# Altium PCB Cat_v2.PcbDoc (part 1 of 2)
Units mil, origin at the board's own origin, x right, y up, seen from the top; angles counter-clockwise.
Board outline 3347.94 x 3903.41 mil, 2 copper layers (Top, Bottom), stack 61.811 mil thick; 112 components, 72 nets, 329 pads, 647 vias.
Unrouted connection lines stored in the file: 1.
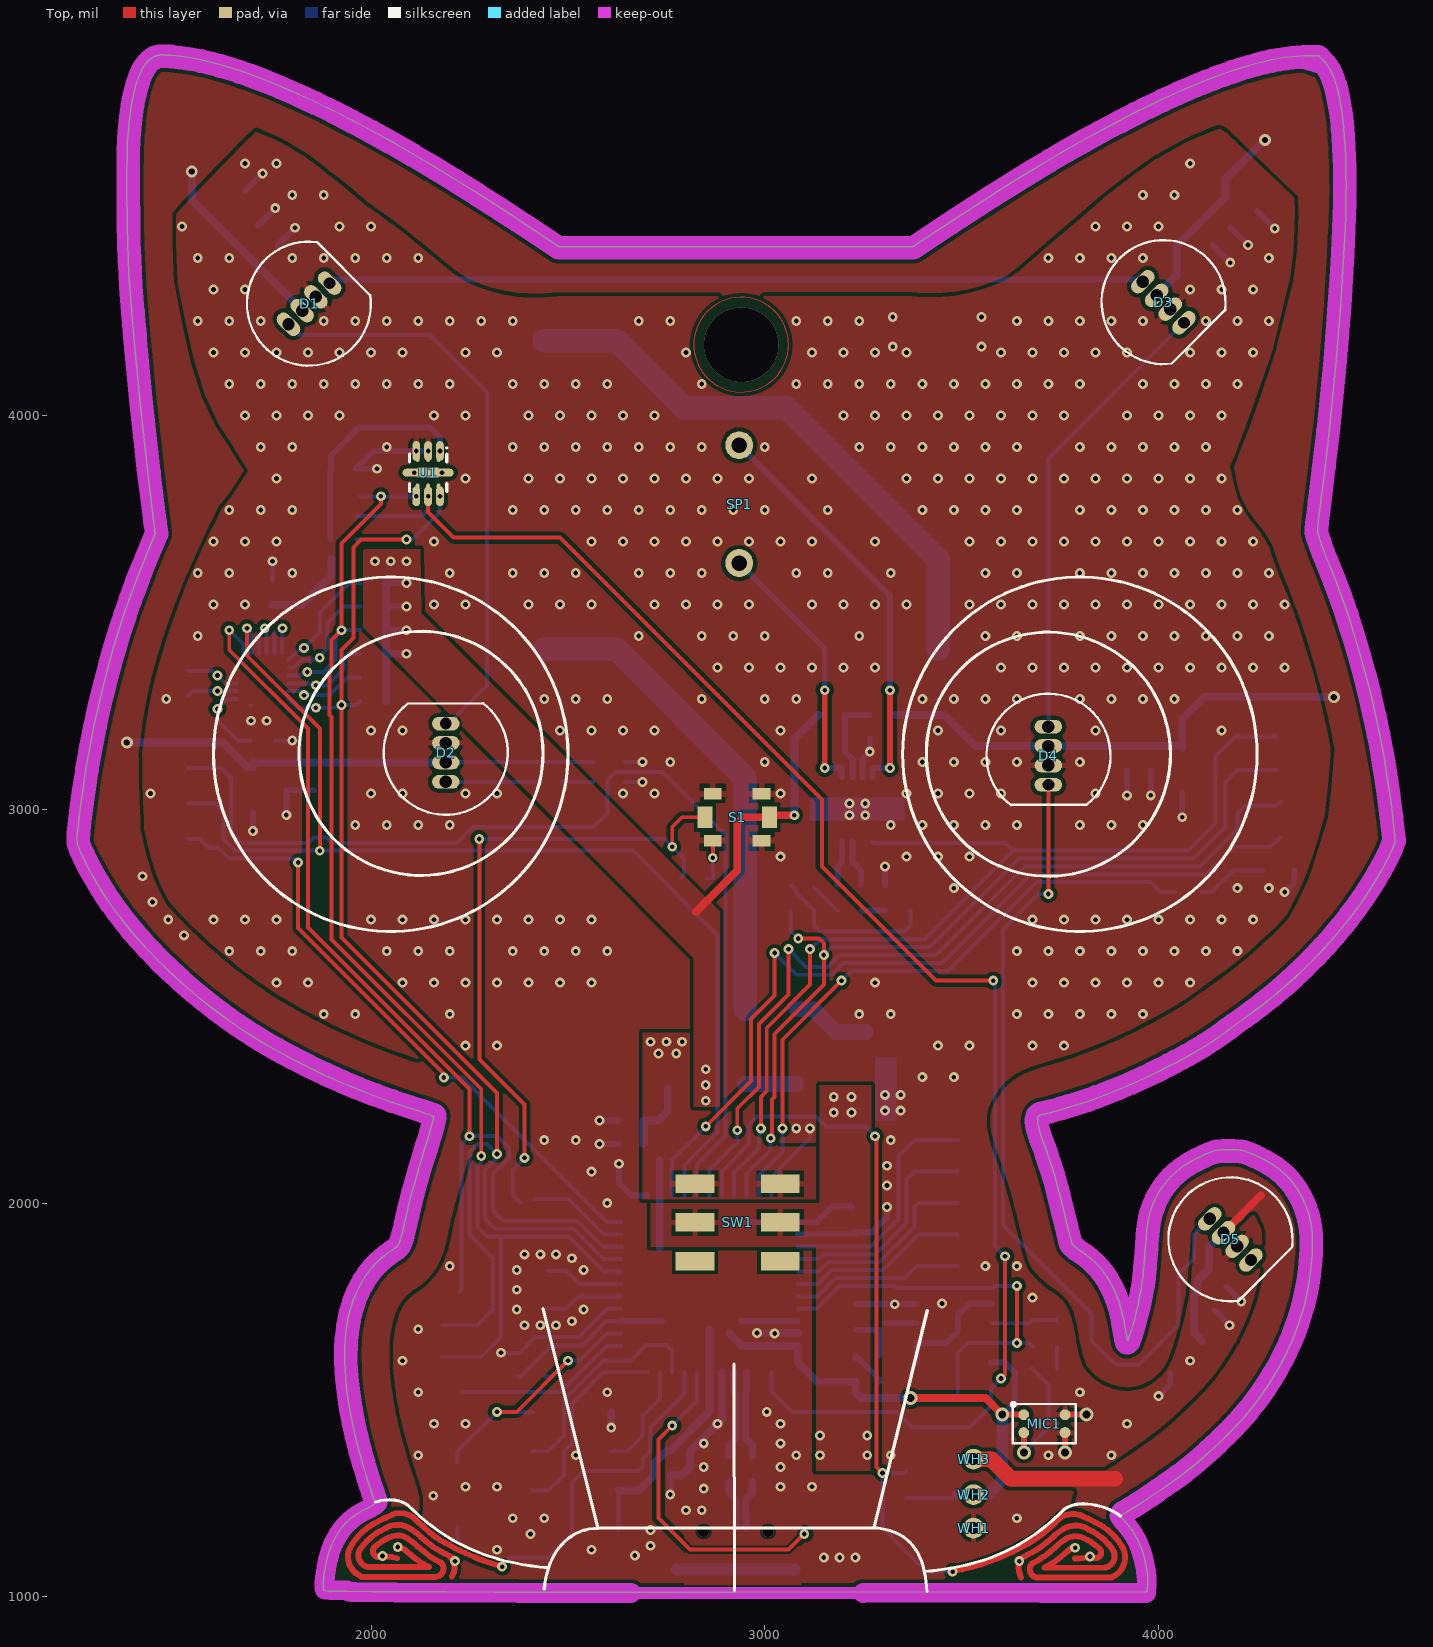
[diagram p0: Top view]
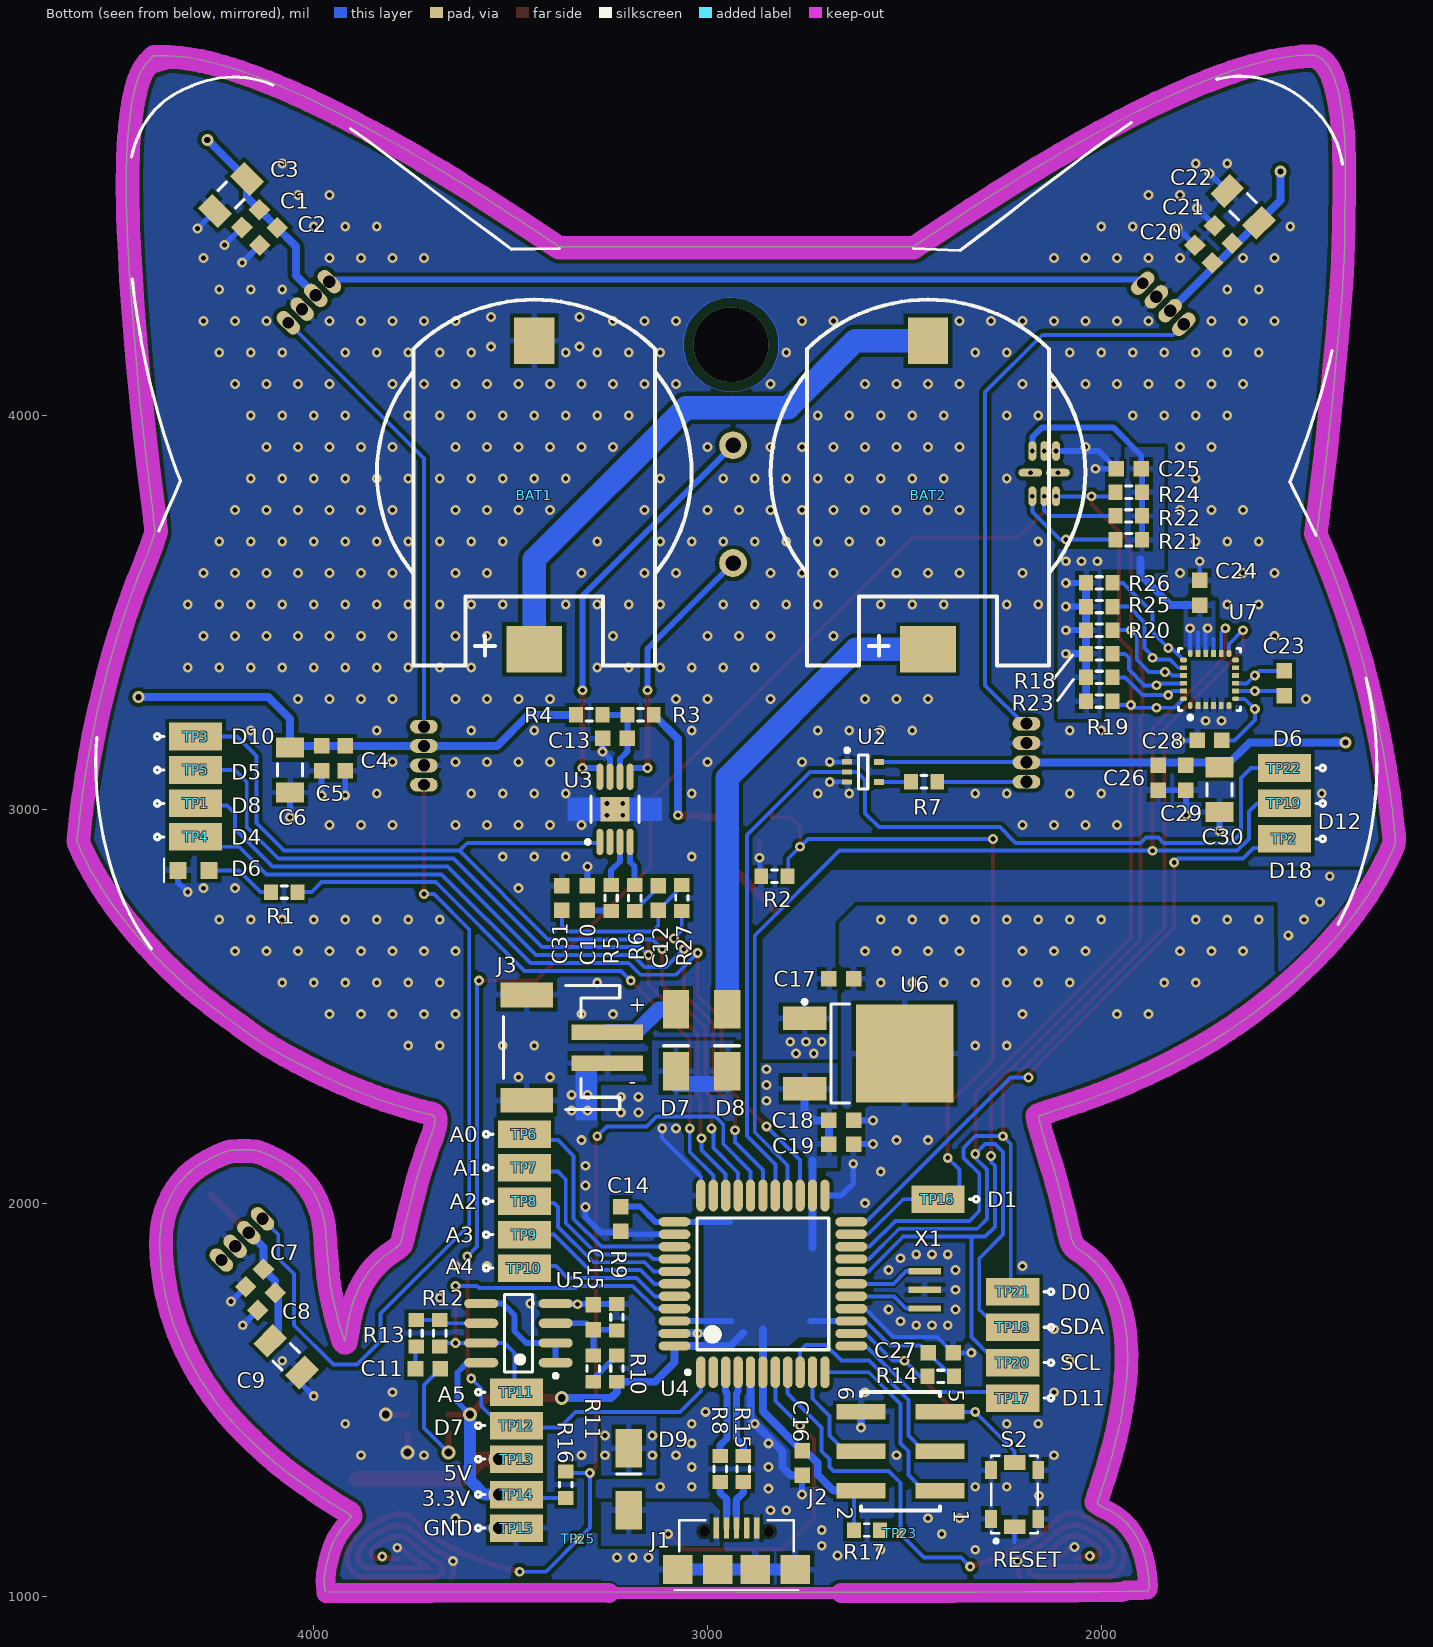
[diagram p1: Bottom view, seen from below]

## Layer stack, top to bottom
Top Solder: solder mask 0.4, Solder Resist, Dk 3.5
Top: signal copper 1.378
Dielectric 1: core 59.055, FR-4, Dk 4.8
Bottom: signal copper 1.378
Bottom Solder: solder mask 0.4, Solder Resist, Dk 3.5

## Board outline
1093 vertices, not listed, extent 1253.26,1012.32 4601.2,4915.73

## Design rules (kind name [scope] priority, off if disabled: settings)
AssemblyTestPointUsage SilkToBoardRegionClearance_1 [All] p1:
AssemblyTestPointUsage [All] p2:
AssemblyTestPointUsage SilkToBoardRegionClearance_2 [All] p3:
Clearance Clearance_Polygon [InNamedPolygon('GND_L02_P056') or InNamedPolygon('GND_L01_P034') or InNamedPolygon('VCC_L01_P036') or InNamedPolygon('VIN_L01_P010') or InNamedPolygon('VCC_L01_P014')] p1: gap=10 ignorepadtopadclearanceinfootprint=FALSE except(0: Arc-Hole Track-Hole SMDPad-Hole THPad-Hole Via-Hole Fill-Hole Poly-Hole Region-Hole Text-Hole)
Clearance Clearance_Diff [InNet('D_N') vs InNet('D_P')] p2: gap=6 ignorepadtopadclearanceinfootprint=FALSE except(0: Arc-Hole Track-Hole SMDPad-Hole THPad-Hole Via-Hole Fill-Hole Poly-Hole Region-Hole Text-Hole)
Clearance [All] p3: gap=6 ignorepadtopadclearanceinfootprint=FALSE except(0: Arc-Hole Track-Hole SMDPad-Hole THPad-Hole Via-Hole Fill-Hole Poly-Hole Region-Hole Text-Hole)
DiffPairsRouting [InDifferentialPairClass('All Differential Pairs')] p1: maxlimit=10 minlimit=6 mostfreqgap=6 toplayer_minwidth=6 toplayer_maxwidth=20 toplayer_prefwidth=18 bottomlayer_minwidth=6 bottomlayer_maxwidth=20 bottomlayer_prefwidth=18 maxuncoupledlength=500
HoleSize [All] p1: absolutevalues=TRUE maxlimit=250 minlimit=11.81 maxpercent=80.000 minpercent=20.000
MatchedLengths DiffPair_DIFF100MatchedLengths [InDifferentialPairClass('DIFF100')] p1: tolerance=6 checknetsindiffpair=TRUE checkdiffpairvsdiffpair=FALSE checkxsignals=FALSE checkothers=FALSE
MinimumSolderMaskSliver [All] p1: minsoldermaskwidth=3.94
PolygonConnect PolygonConnect_Via [IsVia] p1: connectstyle=Direct reliefconductorwidth=10 reliefentries=4 polygonreliefangle="90 Angle" airgapwidth=10
PolygonConnect PolygonConnect_powerstuff [InNet('5V') OR InNet('3.3V') OR InNet('GND') OR InNet('VCC') OR InNet('VIN')] p2: connectstyle=Relief reliefconductorwidth=15 reliefentries=4 polygonreliefangle="90 Angle" airgapwidth=10
PolygonConnect [All] p3: connectstyle=Direct reliefconductorwidth=10 reliefentries=4 polygonreliefangle="90 Angle" airgapwidth=10
RoutingVias [All] p1: holewidth=12 width=25 viastyle="Through Hole" minholewidth=12 minwidth=25 maxholewidth=28 maxwidth=50
SilkToSolderMaskClearance [IsPad] p1 off: minsilkscreentomaskgap=10 clearancetoexposedcopper=TRUE
SolderMaskExpansion [All] p1: expansion=4
Width [All] p1: maxlimit=100 minlimit=6 preferedwidth=10
25 further rules are at their usual default settings.

## Classes and differential pairs
differential pair IND: +IND_P -IND_N
differential pair D: +D_P -D_N

## Components (designator, comment, footprint, x,y, rotation, side; value= is the part's Value field where it differs from the comment)
BAT1 "BAT/Standard" BAT/S8421-45R 3440,4190 r180 bottom
BAT2 "BAT/Standard" BAT/S8421-45R 2440,4190 r180 bottom
C1 "Capacitor" CAPC_MET_1608N 4160,4500 r315 bottom value=0.10uF
C2 "Capacitor" CAPC_MET_1608N 4115,4455 r315 bottom value=4.7uF
C3 "Capacitor" CAPC_MET_3216N 4210,4560 r315 bottom value=47uF
C4 "Capacitor" CAPC_MET_1608N 3920,3130 r270 bottom value=0.10uF
C5 "Capacitor" CAPC_MET_1608N 3980,3130 r270 bottom value=4.7uF
C6 "Capacitor" CAPC_MET_3216N 4060,3100 r270 bottom value=47uF
C7 "Capacitor" CAPC_MET_1608N 4150,1810 r315 bottom value=0.10uF
C8 "Capacitor" CAPC_MET_1608N 4120,1750 r315 bottom value=4.7uF
C9 "Capacitor" CAPC_MET_3216N 4070,1610 r225 bottom value=47uF
C10 "Capacitor" CAPC_MET_1608N 3305,2775 r270 bottom value=3300pF
C11 "Capacitor" CAPC_MET_1608N 3710,1580 r0 bottom value=0.10uF
C12 "Capacitor" CAPC_MET_1608N 3125,2775 r90 bottom value=3300pF
C13 "Capacitor" CAPC_MET_1608N 3235,3180 r180 bottom value=1.0uF
C14 "Capacitor" CAPC_MET_1608N 3220,1960 r90 bottom value=0.10uF
C15 "Capacitor" CAPC_MET_1608N 3290,1710 r270 bottom value=1.0uF
C16 "Capacitor" CAPC_MET_1608N 2760,1340 r90 bottom value=1.0uF
C17 "Capacitor" CAPC_MET_1608N 2660,2570 r180 bottom value=4.7uF
C18 "Capacitor" CAPC_MET_1608N 2660,2210 r0 bottom value=4.7uF
C19 "Capacitor" CAPC_MET_1608N 2660,2150 r0 bottom value=0.10uF
C20 "Capacitor" CAPC_MET_1608N 1740,4410 r45 bottom value=0.10uF
C21 "Capacitor" CAPC_MET_1608N 1690,4460 r45 bottom value=4.7uF
C22 "Capacitor" CAPC_MET_3216N 1640,4530 r45 bottom value=47uF
C23 "Capacitor" CAPC_MET_1608N 1535,3320 r90 bottom value=0.22uF
C24 "Capacitor" CAPC_MET_1608N 1750,3550 r270 bottom value=10uF
C25 "Capacitor" CAPC_MET_1608N 1930,3865 r180 bottom value=0.10uF
C26 "Capacitor" CAPC_MET_1608N 1855,3080 r270 bottom value=0.10uF
C27 "Capacitor" CAPC_MET_1608N 2408,1620 r0 bottom value=0.10uF
C28 "Capacitor" CAPC_MET_1608N 1725,3175 r180 bottom value=10uF
C29 "Capacitor" CAPC_MET_1608N 1785,3080 r270 bottom value=4.7uF
C30 "Capacitor" CAPC_MET_3216N 1700,3050 r270 bottom value=47uF
C31 "Capacitor" CAPC_MET_1608N 3370,2775 r270 bottom value=0.10uF
D1 "DIO/APA106" DIO8MM_4PIN 1790.45,4231.8 r45 top
D2 "DIO/APA106" DIO8MM_4PIN 2190,3070 r90 top
D3 "DIO/APA106" DIO8MM_4PIN 3960,4340 r315 top
D4 "DIO/APA106" DIO8MM_4PIN 3720,3210 r270 top
D5 "DIO/APA106" DIO8MM_4PIN 4130,1960 r315 top
D6 "LED" "LED 0603" 4305,2845 r0 bottom value=RED
D7 "DIO/Schottky" SMA/DO-214AC_wide 3080,2492.26 r270 bottom
D8 "DIO/Schottky" SMA/DO-214AC_wide 2950,2492.26 r270 bottom
D9 "DIO/Schottky" SMA/DO-214AC_wide 3200,1220 r90 bottom
J1 "USB_miniB" 629105136821 2926.3,1175 r180 bottom
J2 "Header 3X2" M20-8760342 2410,1270 r90 bottom value=6
J3 "S2B-PH-SM4-TB" S2B-PH-SM4-TB 3255,2395 r270 bottom
MIC1 "SPQ1410HR5H-B" SPQ1410HR5H-B 3710,1440 r90 top
R1 "Resistor" RESC_MET_1608N 4075,2790 r180 bottom value=330
R2 "Resistor" RESC_MET_1608N 2830,2830 r180 bottom value=10K
R3 "Resistor" RESC_MET_1608N 3170,3240 r0 bottom value=ZERO
R4 "Resistor" RESC_MET_1608N 3300,3240 r180 bottom value=ZERO
R5 "Resistor" RESC_MET_1608N 3245,2775 r90 bottom value=150K
R6 "Resistor" RESC_MET_1608N 3185,2775 r90 bottom value=150K
R7 "Resistor" RESC_MET_1608N 2450,3070 r180 bottom value=470
R8 "Resistor" RESC_MET_1608N 2968,1325 r90 bottom value=22
R9 "Resistor" RESC_MET_1608N 3230,1710 r270 bottom value=10K
R10 "Resistor" RESC_MET_1608N 3230,1580 r90 bottom value=10K
R11 "Resistor" RESC_MET_1608N 3290,1580 r270 bottom value=10K
R12 "Resistor" RESC_MET_1608N 3680,1670 r270 bottom value=100K
R13 "Resistor" RESC_MET_1608N 3740,1670 r90 bottom value=1K
R14 "Resistor" RESC_MET_1608N 2408,1560 r180 bottom value=10K
R15 "Resistor" RESC_MET_1608N 2909,1325 r90 bottom value=22
R16 "Resistor" RESC_MET_1608N 3360,1285 r270 bottom value=2M
R17 "Resistor" RESC_MET_1608N 2595,1170 r0 bottom value=2M
R18 "Resistor" RESC_MET_1608N 2005,3395 r0 bottom value=10K
R19 "Resistor" RESC_MET_1608N 2005,3275 r0 bottom value=10K
R20 "Resistor" RESC_MET_1608N 2005,3455 r0 bottom value=10K
R21 "Resistor" RESC_MET_1608N 1930,3685 r180 bottom value=10K
R22 "Resistor" RESC_MET_1608N 1930,3745 r180 bottom value=10K
R23 "Resistor" RESC_MET_1608N 2005,3335 r0 bottom value=10K
R24 "Resistor" RESC_MET_1608N 1930,3805 r180 bottom value=10K
R25 "Resistor" RESC_MET_1608N 2005,3515 r0 bottom value=10K
R26 "Resistor" RESC_MET_1608N 2005,3575 r0 bottom value=10K
R27 "Resistor" RESC_MET_1608N 3065,2775 r90 bottom value=10K
S1 "" PTS820_noPegs 2930,2980 r0 top
S2 "RESET" PTS820_noPegs 2220,1260 r90 bottom
SP1 "Speaker" SPEAKER/15MM 2935,3775 r270 top
SW1 "JS202011SCQN" JS202011SCQN 2931,1951 r90 top locked
TP1 "D8" TP/SMT135x70/HOOK 4300,3015 r180 bottom
TP2 "D18" TP/SMT135x70/HOOK 1535,2925 r0 bottom
TP3 "D10" TP/SMT135x70/HOOK 4300,3185 r180 bottom
TP4 "D4" TP/SMT135x70/HOOK 4300,2930 r180 bottom
TP5 "D5" TP/SMT135x70/HOOK 4300,3100 r180 bottom
TP6 "A0" TP/SMT135x70/HOOK 3465,2175 r180 bottom
TP7 "A1" TP/SMT135x70/HOOK 3465,2090 r180 bottom
TP8 "A2" TP/SMT135x70/HOOK 3465,2005 r180 bottom
TP9 "A3" TP/SMT135x70/HOOK 3465,1920 r180 bottom
TP10 "A4" TP/SMT135x70/HOOK 3465,1835 r180 bottom
TP11 "A5" TP/SMT135x70/HOOK 3485,1520 r180 bottom
TP12 "D7" TP/SMT135x70/HOOK 3485,1435 r180 bottom
TP13 "5V" TP/SMT135x70/HOOK 3485,1350 r180 bottom
TP14 "3.3V" TP/SMT135x70/HOOK 3485,1260 r180 bottom
TP15 "GND" TP/SMT135x70/HOOK 3485,1175 r180 bottom
TP16 "D1" TP/SMT135x70/HOOK 2415,2010 r0 bottom
TP17 "D11" TP/SMT135x70/HOOK 2225,1505 r0 bottom
TP18 "SDA" TP/SMT135x70/HOOK 2225,1685 r0 bottom
TP19 "D12" TP/SMT135x70/HOOK 1535,3015 r0 bottom
TP20 "SCL" TP/SMT135x70/HOOK 2225,1595 r0 bottom
TP21 "D0" TP/SMT135x70/HOOK 2225,1775 r0 bottom
TP22 "D6" TP/SMT135x70/HOOK 1535,3105 r0 bottom
TP23 "TP/Standard" TP/SMT20X24 2510,1162 r180 bottom
TP25 "TP/Standard" TP/SMT20X24 3328,1148 r180 bottom
U1 "OPT3001" SON65P200X65_HS-7N 2145,3855 r270 top
U2 "SN74LV1T125DCKR" DCK0005A_L 2605,3095 r180 bottom
U3 "TPA2005D1DGNRG4" TI-DGN8-1760X1425TP_N 3235,3000 r90 bottom
U4 "ATmega32U4-AU" 44ML_M 2859.3,1795 r90 bottom locked
U5 "LMV358MX" M08A_N 3480,1670 r0 bottom
U6 "LDF33DT-TR" DPAK228P972X240-3N 2590,2380 r180 bottom
U7 "LSM9DS0" STM-LGA-24_V 1725,3330 r90 bottom
WH1 "WIRE_HOLE" "24AWG HOLE" 3530,1175 r90 top
WH2 "WIRE_HOLE" "24AWG HOLE" 3530,1260 r90 top
WH3 "WIRE_HOLE" "24AWG HOLE" 3530,1350 r0 top
X1 "CSTCE_G" CSTCE_G 2448,1780 r90 bottom value="8.00 MHz"

## Footprints (in the part's own frame and the unit in brackets; to place one, negate y for a bottom-side part, rotate by r counter-clockwise, add the part's x,y. Pads: shape width x height; smd on the part's side, far side on the other; paste and mask are expansions set on the pad)
"24AWG HOLE" [mm] "Wire Via"
  round 1.33 hole 0.76: 1(0,0)
44ML_M [mm] "Thin QFP, 44-Leads, Body 10x10mm, Pitch 0.8mm, IPC Low Density"
  oval 2.05x0.6 smd: 1(-5.7,4) 2(-5.7,3.2) 3(-5.7,2.4) 4(-5.7,1.6) 5(-5.7,0.8) 6(-5.7,0) 7(-5.7,-0.8) 8(-5.7,-1.6) 9(-5.7,-2.4) 10(-5.7,-3.2) 11(-5.7,-4) 23(5.7,-4) 24(5.7,-3.2) 25(5.7,-2.4) 26(5.7,-1.6) 27(5.7,-0.8) 28(5.7,0) 29(5.7,0.8) 30(5.7,1.6) 31(5.7,2.4) 32(5.7,3.2) 33(5.7,4)
  oval 0.6x2.05 smd: 12(-4,-5.7) 13(-3.2,-5.7) 14(-2.4,-5.7) 15(-1.6,-5.7) 16(-0.8,-5.7) 17(0,-5.7) 18(0.8,-5.7) 19(1.6,-5.7) 20(2.4,-5.7) 21(3.2,-5.7) 22(4,-5.7) 34(4,5.7) 35(3.2,5.7) 36(2.4,5.7) 37(1.6,5.7) 38(0.8,5.7) 39(0,5.7) 40(-0.8,5.7) 41(-1.6,5.7) 42(-2.4,5.7) 43(-3.2,5.7) 44(-4,5.7)
  silkscreen extent -5.82,-4.25 4.25,4.98, body extent -5,-5 5,5, height 1.2
629105136821 [mm]
  rect 0.343x1.35 smd: 1(-1.3,0) 2(-0.65,0) 3(0,0) 4(0.65,0) 5(1.3,0)
  rect 1.9x1.9 smd: 6(-3.8,-2.675) 7(-1.2,-2.675) 8(1.2,-2.675) 9(3.8,-2.675)
  silkscreen extent -4,-4 4,0.5
BAT/S8421-45R [mm] "CR2032 Holder"
  rect 3.6x3 smd: 1(0,-19.9)
  rect 2.6x3 smd: 2(0,0)
  silkscreen extent -10.15,-20.95 10.15,2.65, body extent -10,-20.95 10,2.67, height 5.4
CAPC_MET_1608N [mm] "Chip Capacitor, Body 1.6x0.8mm, IPC Medium Density"
  rect 1x1 smd: 1(-0.8,0) 2(0.8,0)
  body extent -0.87,-0.47 0.87,0.47, height 0.85
CAPC_MET_3216N [mm] "Chip Capacitor, Body 3.2x1.6mm, IPC Medium Density"
  rect 1.3x1.8 smd: 1(-1.45,0) 2(1.45,0)
  silkscreen extent -0.4,-0.8 0.4,0.8, body extent -1.7,-0.9 1.7,0.9, height 1.35
CSTCE_G [mm]
  rect 0.4x2.1 smd: 1(-1.2,0) 2(0,0) 3(1.2,0)
  body extent -1.6,-0.7 1.6,0.7, height 0.7
DCK0005A_L [mm] "SOT23, 5-Leads, Body 2.15x1.4mm, Pitch 0.65mm, IPC High Density"
  rrect25% 0.65x0.343 smd: 1(-1.025,0.65) 2(-1.025,0) 3(-1.025,-0.65)
  rrect25% 0.65x0.4 smd: 4(1.025,-0.65) 5(1.025,0.65)
  silkscreen extent -1.15,-1.1 0.3,1.52, body extent -1.14,-1 1.14,1, height 0.94
DIO8MM_4PIN [mil]
  oval 35x70 hole 31.5: 1(0,0) 2(49.21,0) 3(98.43,0)
  oval 35x70 hole 30: 4(147.64,0)
  silkscreen extent -84,-157 199,158, body extent -100,-173 247,173, height 394
DPAK228P972X240-3N [mm] "D-PAK, 3-Pads, Body 6.40x6.56mm (max), IPC Medium Density"
  rect 2.8x1.5 smd: 1(-4.15,2.28) 3(-4.15,-2.28)
  rect 6.3x6.3 smd: 4(2.3,0)
  silkscreen extent -4.28,-3.2 -1.25,3.45, body extent -4.22,-3.2 5.5,3.2, height 2.4
JS202011SCQN [mm]
  rect 1.2x2.5 smd: 1(-2.5,-2.75)
  rect 1.194x2.502 smd: 2(0,-2.75) 3(2.5,-2.75) 4(-2.5,2.75) 5(0,2.75) 6(2.5,2.75)
  body extent -4.5,-2 4.5,2, height 5.5
"LED 0603" [mm]
  rect 1.1x1.1 smd: A(-1,0) K(1,0)
  silkscreen extent 1.91,-0.76 1.91,0.76, body extent -0.84,-0.8 0.84,0.35, height 0.6
M08A_N [mm] "SOIC, 8-Leads, Body 4.9x3.9mm, Pitch 1.27mm, IPC Medium Density"
  oval 2.2x0.6 smd: 1(-2.4,1.905) 2(-2.4,0.635) 3(-2.4,-0.635) 4(-2.4,-1.905) 5(2.4,-1.905) 6(2.4,-0.635) 7(2.4,0.635) 8(2.4,1.905)
  silkscreen extent -2.52,-2.5 0.9,2.88, body extent -2,-2.5 2,2.5, height 1.75
M20-8760342 [mm] "HEADER SMT 2X3"
  rect 1x3.15 smd: 1(0,0) 2(0,5.08) 3(2.54,0) 4(2.54,5.08) 5(5.08,0) 6(5.08,5.08)
  silkscreen extent -1.27,0 6.35,5.08, body extent -1.27,-1.14 6.35,6.22, height 9.65
PTS820_noPegs [mm]
  rect 0.95x1.4 smd: 1(-2.075,0) 2(2.075,0)
  rect 1.15x0.75 smd: MH(-1.575,-1.525) MH(-1.575,1.525) MH(1.575,-1.525) MH(1.575,1.525)
  body extent -2,-1.5 2,1.5, height 2.5
RESC_MET_1608N [mm] "Chip Resistor, Body 1.6x0.8mm, IPC Medium Density"
  rect 0.9x1 smd: 1(-0.85,0) 2(0.85,0)
  silkscreen extent -0.2,-0.4 0.2,0.4, body extent -0.85,-0.48 0.85,0.48, height 0.6
S2B-PH-SM4-TB [mm]
  rect 1x4.6 smd: 1(1,0.017) 2(-1,0.017)
  rect 1.6x3.4 smd: MT1(-3.4,-5.183) MT2(3.4,-5.183)
  silkscreen extent -4,-6.68 4,0.82, body extent -3.99,-6.68 4.01,0.81, height 5.5
SMA/DO-214AC_wide [mm] "DO-214-AC/SMA; DC version"
  rect 2.5x1.7 smd: A(0,0) K(4,0)
  silkscreen extent 2.35,-0.8 2.35,0.8, body extent -0.25,-1.5 4.25,1.5, height 2.3
SON65P200X65_HS-7N [mm] "SON, 6-Leads, Body 2.00x2.00mm, Pitch 0.65mm, Thermal Pad 1.35x0.65mm, IPC Medium Density"
  oval 0.5x0.25 smd: 1(-0.95,0.675) 2(-0.95,0) 3(-0.95,-0.675) 4(0.95,-0.675) 5(0.95,0) 6(0.95,0.675)
  rect 0.65x1.35 smd: 7(0,0)
  silkscreen extent -1.65,-1.2 1.2,1.25, body extent -1.15,-1.05 1.15,1.05, height 0.65
SPEAKER/15MM [mm]
  round 1.8 hole 1: 1(-3.8,0) 2(3.8,0)
  body extent -7.5,-7.5 7.5,8.5, height 7.6
SPQ1410HR5H-B [mm]
  round 0.7 smd: 1(0.575,1.33) 2(0.575,-1.33) 3(-0.575,-1.33) 4(-0.575,1.33)
  silkscreen extent -1.27,-2.03 1.27,2.03, body extent -1.14,-1.91 1.14,1.91, height 1.1
STM-LGA-24_V [mm] "LGA, 24-Leads, Body 4x4mm, Pitch 0.5mm"
  oct 0.45x0.3 smd mask+0.05: 1(-1.675,1.25) 6(-1.675,-1.25) 13(1.675,-1.25) 18(1.675,1.25)
  rect 0.45x0.3 smd mask+0.05: 2(-1.675,0.75) 3(-1.675,0.25) 4(-1.675,-0.25) 5(-1.675,-0.75) 14(1.675,-0.75) 15(1.675,-0.25) 16(1.675,0.25) 17(1.675,0.75)
  oct 0.3x0.45 smd mask+0.05: 7(-1.25,-1.675) 12(1.25,-1.675) 19(1.25,1.675) 24(-1.25,1.675)
  rect 0.3x0.45 smd mask+0.05: 8(-0.75,-1.675) 9(-0.25,-1.675) 10(0.25,-1.675) 11(0.75,-1.675) 20(0.75,1.675) 21(0.25,1.675) 22(-0.25,1.675) 23(-0.75,1.675)
  silkscreen extent -2.57,-2 2,2, body extent -2,-2 2,2, height 1.07
TI-DGN8-1760X1425TP_N [mm] "SOP, 8-Leads, Body 3.1x3.1mm, Pitch 0.65mm, Thermal Pad 1.89x1.57mm, IPC Medium Density"
  oval 1.7x0.45 smd: 1(-2.1,0.975) 2(-2.1,0.325) 3(-2.1,-0.325) 4(-2.1,-0.975) 5(2.1,-0.975) 6(2.1,-0.325) 7(2.1,0.325) 8(2.1,0.975)
  rect 1.57x1.89 smd: 9(0,0)
  silkscreen extent -2.22,-1.55 0.85,1.88, body extent -1.55,-1.55 1.55,1.55, height 1.1
TP/SMT20X24 [mil]
  rect 20x24 smd paste-50: 1(0,0)
TP/SMT135x70/HOOK [mil] "SMT Test Point - 135mil x 70mil With Hook"
  rect 135x70 smd: 1(0,0)
  silkscreen extent -104,-7 -80,7, body extent -53,-20 53,20, height 60

## Part data
BAT1 BAT2: library part S8421-45R, "HOLDER BATT COIN CR2032/20MM", Manufacturer 1=Harwin, Supplier Part Number 1=952-1737-1-ND, Cost=0.75, id=517, Manufacturer Part Number 1=S8421-45R, tbl_component_type_id=10, tbl_suppliers_id=1
C1 C4 C7 C11 C14 C19 C20 C25 C26 C27 C31: library part GRM188R71C104KA01D, "CAP CER 0.1UF 16V X7R 0603", Manufacturer 1=Murata, Manufacturer 2=Any, Manufacturer Part Number 2="See Description", Supplier Part Number 1=490-1532-1-ND, Cost=0.01, id=625, Manufacturer Part Number 1=GRM188R71C104KA01D, tbl_component_type_id=2, tbl_suppliers_id=1
C2 C5 C8 C17 C18 C21 C29: library part CL10B475KQ8NQNC, "CAP CER 4.7UF 6.3V X7R 0603", Manufacturer 1=Samsung, Supplier Part Number 1=1276-2087-1-ND, Cost=0.03, id=639, Manufacturer Part Number 1=CL10B475KQ8NQNC, tbl_component_type_id=2, tbl_suppliers_id=1
C3 C6 C9 C22 C30: library part GRM31CR60J476ME19L, "CAP CER 47UF 6.3V 20% X5R 1206", Manufacturer 1=Murata, Manufacturer 2=Any, Manufacturer Part Number 2="See Description", Supplier Part Number 1=490-3907-1-ND, Cost=0.25, id=803, Manufacturer Part Number 1=GRM31CR60J476ME19L, tbl_component_type_id=2, tbl_suppliers_id=1
C10 C12: library part CL10B332KB8NNNC, "CAP CER 3300PF 50V X7R 0603", Manufacturer 1=Samsung, Manufacturer 2=Any, Manufacturer Part Number 2="See Description", Supplier Part Number 1=1276-1758-1-ND, Cost=0.01, id=894, Manufacturer Part Number 1=CL10B332KB8NNNC, tbl_component_type_id=2, tbl_suppliers_id=1
C13 C15 C16: library part C1608X7R1C105M, "CAP CER 0603 16V X7R 20%", Manufacturer 1=TDK, Manufacturer 2=Any, Manufacturer Part Number 2="See Description", Supplier Part Number 1=445-5131-2-ND, Cost=0.04, id=99, Manufacturer Part Number 1=C1608X7R1C105M, tbl_component_type_id=2, tbl_suppliers_id=1
C23: library part C1608X7R1C224K080AC, "CAP CER 0.22UF 16V X7R 0603", Manufacturer 1=TDK, Manufacturer 2=Any, Manufacturer Part Number 2="See Description", Supplier Part Number 1=445-1318-1-ND, Cost=0.03, id=624, Manufacturer Part Number 1=C1608X7R1C224K080AC, tbl_component_type_id=2, tbl_suppliers_id=1
C24 C28: library part GRM188R61C106MA73D, "CAP CER 10UF 16V 20% X5R 0603", Manufacturer 1=Murata, Supplier Part Number 1=490-7201-1-ND, Cost=0.12, id=510, Manufacturer Part Number 1=GRM188R61C106MA73D, tbl_component_type_id=2, tbl_suppliers_id=1
D1 D2 D3 D4 D5: library part APA106-F8-8, "LED RGB DIFF 8MM ROUND T/H", Manufacturer 1=Misc, Manufacturer 2=Any, Manufacturer Part Number 2="See Description", Cost=1, id=883, Manufacturer Part Number 1=APA106-F8-8, Supplier Part Number 1=APA106-F8-8, tbl_component_type_id=4, tbl_suppliers_id=1
D6: library part LTST-S270KRKT, "LED RED CLEAR 0603 R/A SMD", Manufacturer 1=Lite-On, Supplier Part Number 1=160-1479-1-ND, Cost=0.1, id=689, Manufacturer Part Number 1=LTST-S270KRKT, tbl_component_type_id=4, tbl_suppliers_id=1
D7 D8 D9: library part B340A-13-F, "DIODE SCHOTTKY 40V 3A SMA", Manufacturer 1="Diodes Inc.", Manufacturer 2=Any, Manufacturer Part Number 2="See Description", Supplier Part Number 1=B340A-FDICT-ND, Cost=0.23, id=888, Manufacturer Part Number 1=B340A-13-F, tbl_component_type_id=4, tbl_suppliers_id=1
J1: library part 629105136821, "USB Micro B", Manufacturer 1=Wurth, Supplier Part Number 1=732-3155-2-ND, Cost=0.95, id=886, Manufacturer Part Number 1=629105136821, tbl_component_type_id=8, tbl_suppliers_id=1
J2: library part M20-8760342, "2X3POS DIL VERTICAL SMT HEADER", Manufacturer 1=Harwin, Manufacturer 2=Molex, Manufacturer Part Number 2=0015912060, Supplier Part Number 1=952-1922-ND, Cost=0.29, id=776, LatestRevisionDate=17-Jul-2002, LatestRevisionNote="Re-released for DXP Platform.", Manufacturer Part Number 1=M20-8760342, Publisher="Altium Limited", tbl_component_type_id=8, tbl_suppliers_id=1
J3: "2 Positions Header, Shrouded Connector 0.079\" (2.00mm) Surface Mount, Right Angle Tin", Manufacturer 1=JST, Supplier Part Number 1=455-1749-1-ND, Cost=0.42, id=918, Manufacturer Part Number 1=S2B-PH-SM4-TB, tbl_component_type_id=8, tbl_suppliers_id=1
MIC1: "MIC MEMS ANALOG OMNI -42DB", Manufacturer 1="Knowles Acoustics", Manufacturer 2=Any, Manufacturer Part Number 2="See Description", Supplier Part Number 1=423-1213-1-ND, Cost=0.6, id=905, Manufacturer Part Number 1=SPQ1410HR5H-B, tbl_component_type_id=10, tbl_suppliers_id=1
R1: library part ERJ-1GEJ331C, "RES SMD 330 OHM 5% 1/20W 0201", Manufacturer 1=Panasonic, Manufacturer 2=Any, Manufacturer Part Number 2="See Description", Supplier Part Number 1=P330AGTR-ND, Cost=0.03, id=382, Manufacturer Part Number 1=ERJ-1GEJ331C, tbl_component_type_id=1, tbl_suppliers_id=1
R2 R9 R10 R11 R14 R18 R19 R20 R21 R22 R23 R24 R25 R26 R27: library part ERJ-3EKF1002V, "RES 0603 10K 1% 0.1W", Manufacturer 1=Panasonic, Supplier Part Number 1=P10.0KHTR-ND, id=3, Manufacturer Part Number 1=ERJ-3EKF1002V, tbl_component_type_id=1, tbl_suppliers_id=1
R3 R4: library part ERJ-3GEY0R00V, "RES 0603 ZERO 0.1W", Manufacturer 1=Panasonic, Supplier Part Number 1=P0.0GTR-ND, id=70, Manufacturer Part Number 1=ERJ-3GEY0R00V, tbl_component_type_id=1, tbl_suppliers_id=1
R5 R6: library part ERJ-3EKF1503V, "RES 0603 150K 1% 0.1W", Manufacturer 1=Panasonic, Manufacturer 2=Any, Manufacturer Part Number 2="See Description", Supplier Part Number 1=P150KHTR-ND, Cost=0.01, id=230, Manufacturer Part Number 1=ERJ-3EKF1503V, tbl_component_type_id=1, tbl_suppliers_id=1
R7: library part RC0603FR-07470RL, "RES SMD 470 OHM 1% 1/10W 0603", Manufacturer 1=Yageo, Manufacturer 2=Any, Manufacturer Part Number 2="See Description", Supplier Part Number 1=311-470HRCT-ND, Cost=0.01, id=887, Manufacturer Part Number 1=RC0603FR-07470RL, tbl_component_type_id=1, tbl_suppliers_id=1
R8 R15: library part RC0603JR-0722RL, "RES SMD 22 OHM 5% 1/10W 0603", Manufacturer 1=Yageo, Manufacturer 2=Any, Manufacturer Part Number 2="See Description", Supplier Part Number 1=311-22GRCT-ND, Cost=0, id=890, Manufacturer Part Number 1=RC0603JR-0722RL, tbl_component_type_id=1, tbl_suppliers_id=1
R12: library part ERJ-3EKF1003V, "RES 0603 100K 1% 0.1W", Manufacturer 1=Panasonic, Supplier Part Number 1=P100KHTR-ND, id=2, Manufacturer Part Number 1=ERJ-3EKF1003V, tbl_component_type_id=1, tbl_suppliers_id=1
R13: library part ERJ-3EKF1001V, "RES 0603 1K 1% 0.1W", Manufacturer 1=Panasonic, Supplier Part Number 1=P1.00KHTR-ND, id=1, Manufacturer Part Number 1=ERJ-3EKF1001V, tbl_component_type_id=1, tbl_suppliers_id=1
R16 R17: library part ERJ-3EKF2004V, "RES SMD 2M OHM 1% 1/10W 0603", Manufacturer 1=Panasonic, Manufacturer 2=Any, Manufacturer Part Number 2="See Description", Supplier Part Number 1=P2.00MHCT-ND, Cost=0.01, id=493, Manufacturer Part Number 1=ERJ-3EKF2004V, tbl_component_type_id=1, tbl_suppliers_id=1
S1 S2: library part "PTS820 J20M SMTR LFS", "SWITCH TACTILE SPST-NO 0.05A 12V", Manufacturer 1="C&K Components", Manufacturer 2=Any, Manufacturer Part Number 2="See Description", Supplier Part Number 1=CKN10505CT-ND, Cost=0.36, id=875, Manufacturer Part Number 1="PTS820 J20M SMTR LFS", tbl_component_type_id=10, tbl_suppliers_id=1
SP1: library part CVS-1508, "SPEAKER 8 OHM .3W 15MM ROUND", Manufacturer 1=CUI, Manufacturer 2="PUI Audio", Manufacturer Part Number 2=AST-01508MR-R, Supplier Part Number 1=102-2498-ND, Cost=2.09, id=903, Manufacturer Part Number 1=CVS-1508, tbl_component_type_id=10, tbl_suppliers_id=1
SW1: "SWITCH SLIDE DPDT 300MA 6V", Manufacturer 1="C&K Components", Manufacturer 2=Any, Manufacturer Part Number 2="See Description", Supplier Part Number 1=401-2002-1-ND, Cost=0.37, id=909, Manufacturer Part Number 1=JS202011SCQN, tbl_component_type_id=10, tbl_suppliers_id=1
TP1 TP2 TP3 TP4 TP5 TP6 TP7 TP8 TP9 TP10 TP11 TP12 TP13 TP14 TP15 TP16 TP17 TP18 TP19 TP20 TP21 TP22: library part 5015, "SMT Test Point - 135mil x 70mil With Hook", Manufacturer 1=Keystone, Supplier Part Number 1=5015KCT-ND, Cost=0.29, id=120, Manufacturer Part Number 1=5015, tbl_component_type_id=10, tbl_suppliers_id=1
TP23 TP25: library part "SMT Test Point 20x24mil Square", "SMT Test Point 20x24mil Square", Manufacturer 1="Test Point", id=793, Manufacturer Part Number 1="SMT Test Point 20x24mil Square", tbl_component_type_id=10
U1: library part OPT3001DNPT, "IC AMBIENT LIGHT SENSOR 6USON", Manufacturer 1="Texas Instruments", Manufacturer 2=Any, Manufacturer Part Number 2="See Description", Supplier Part Number 1=296-38667-1-ND, Cost=2.09, id=884, Manufacturer Part Number 1=OPT3001DNPT, tbl_component_type_id=7, tbl_suppliers_id=1
U2: library part CMP-0859-00356-3, "Single Power Supply, Single BUFFER GATE w/ 3-State Output (active low enable), DCK0005A, LARGE T&R", F @ Nom Voltage(Max)(Mhz)=50, Generic Part Number=SN74LV1T125, ICC @ Nom Voltage(Max)(mA)=0.01, Manufacturer="Texas Instruments", Operating Temperature Range(C)="-40 to 125", Rating=Catalog, tpd @ Nom Voltage(Max)(ns)=14.5,9.5,8.0,6.5, Voltage(Nom)(V)=1.8,2.5,3.3,5.5, 3-State Output=Yes, Bits(#)=1, DatasheetVersion=SCLS745A, Input Type=TTL, Logic=True, Manufacturer Part Number 1=SN74LV1T125DCKR, Output Drive (IOL/IOH)(Max)(mA)=8/-8, Output Type=CMOS, PackageReference=DCK0005A, PartId=1, Schmitt Trigger=No, Special Features="1.8V to 3.3V Up Translation,3.3V to 1.8V Down Translation,5V Input Tolerant", Sub-Family="Non-Inverting Buffer/Driver", Technology Family=LV1T, VCC(Max)(V)=5.5, VCC(Min)(V)=1.6
U3: library part CMP-0991-00100-1, "1.4-W Mono Class-D Audio Amplifier, -40 to 85 degC, 8-pin SOP (DGN8), Green (RoHS & no Sb/Br)", Manufacturer="Texas Instruments", Output Power(W)=1.18, Supply Max(Max)(Volt)=5.5, Supply Min(Min)(Volt)=2.5, Code_JEDEC=MO-187, ComponentLink1Description="Manufacturer URL", ComponentLink1URL=http://www.ti.com/, ComponentLink2Description=Datasheet, ComponentLink2URL=http://www.ti.com/general/docs/lit/getliterature.tsp?genericPartNumber=TPA2005D1&fileType=pdf, ComponentLink3Description="Package Specification", ComponentLink3URL=http://www.ti.com/litv/pdf/mpds046e, DatasheetVersion=SLOS369F, Eco-Plan="Green (RoHS & no Sb/Br)", Manufacturer Part Number 1=TPA2005D1DGNRG4, Mounting Technology="Surface Mount", PackageDescription="8-Pin Plastic Small Outline, Body 3 x 3 mm, Pitch 0.65 mm", PackageReference=DGN8-1760X1425TP, PackageVersion="4073271/F, 05/2011", PSRR(dB)=-75, Speaker Amp Type=Class-D, Speaker Channels=Mono, SubFamily="Dynamic Speaker"
U4: library part CMP-0095-00285-2, "8-bit AVR Microcontroller, 2.7-5.5V, 16MHz, 32KB Flash, 1KB EEPROM, 2.5KB SRAM, USB Controller, 44-pin TQFP, Industrial Grade (-40°C to 85°C), Ext Osc", ComponentLink1Description="Manufacturer URL", ComponentLink1URL=http://www.atmel.com/, ComponentLink2Description="ATmega16U4/32U4 Datasheet", ComponentLink2URL=http://www.atmel.com/dyn/resources/prod_documents/doc7766.pdf, ComponentLink3Description="ATmega16U4 ATmega32U4 Summary", ComponentLink3URL=http://www.atmel.com/dyn/resources/prod_documents/7766S.pdf, DatasheetVersion="revF, Nov-2010", Manufacturer Part Number 1=ATmega32U4-AU, PackageDescription="44-Pin Plastic Thin Quad Flat Pack, 10 x 10 x 1.0 mm Body, 0.8 mm Pitch (TQFP)", PackageReference=44ML, PackageVersion="rev.G, Jul-2007", RevisionNote="DatasheetVersion updated. URLs added."
U5: library part CMP-0055-00557-2, "General Purpose, Low Voltage, Rail-to-Rail Output Operational Amplifiers, 8-pin Narrow SOIC", Manufacturer="National Semiconductor", PackageTopMarking=NSZXTT*LMV*358M, PowerWise=N, Code_IPC=SOIC127P600-8, Code_JEDEC=MS-012-AA, ComponentLink1Description="LMV358 Datasheet", ComponentLink1URL=http://www.national.com/ds/LM/LMV358.pdf, ComponentLink2Description="LMV358 Web Page", ComponentLink2URL=http://www.national.com/pf/LM/LMV358.html, ComponentLink3Description="M08A Package Page", ComponentLink3URL=http://www.national.com/packaging/folders/m08a.html, CompType=Amplifiers, DatasheetVersion=Sep-2009, Manufacturer Part Number 1=LMV358MX, PackageDescription="SOIC Narrow, 4.9 x 3.9 x 1.45mm, 8 Lead, 1.27mm Pitch", PackageReference=M08A, PackageVersion="revM, May-2009", PartId=1, PinCount=8, RevisionNote="Component URLs added", RoHS=N
U6: "IC REG LDO 3.3V 1A DPAK", Manufacturer 1=STMicroelectronics, Manufacturer 2=Any, Manufacturer Part Number 2="See Description", Supplier Part Number 1=497-14661-1-ND, Cost=1.09, id=907, Manufacturer Part Number 1=LDF33DT-TR, tbl_component_type_id=7, tbl_suppliers_id=1
U7: library part CMP-1273-00001-1, "INEMO Inertial Module: 3D Accelerometer, 3D Gyroscope, 3D Magnetometer, 2.4 to 3.6 V, -40 to 85 degC, 24-Pin LGA, RoHS, Tray", Manufacturer=STMicroelectronics, Operating Temperature Range="-40 to 85 degC", Bandwidth="400 kHz", ComponentLink1Description="Manufacturer URL", ComponentLink1URL=http://www.st.com/, ComponentLink2Description=Datasheet, ComponentLink2URL=http://www.st.com/st-web-ui/static/active/en/resource/technical/document/datasheet/DM00087365.pdf, ComponentLink3Description="Package Specification", ComponentLink3URL=http://www.st.com/st-web-ui/static/active/en/resource/technical/document/datasheet/DM00087365.pdf, DatasheetVersion="Rev. 2", IDD_G="6.1 mA Typ.", IDD_G_LP="2 mA Typ.", IDD_PDN="6 uA Typ.", IDD_XM="350 uA Typ.", Manufacturer Part Number 1=LSM9DS0, Mounting Technology="Surface Mount", PackageDescription="24-Pin Land Grid Array, Body 4 x 4 mm, Pitch 0.5 mm", Packing=Tray, RoHS=TRUE, VDD="2.4 to 3.6 V", VDDIO="1.71 V Min."
WH1 WH2 WH3: library part "Wire Hole 24AWG", "Via for 24AWG wire", Manufacturer 1="MECHANICAL (NON-BOM)", id=606, Manufacturer Part Number 1="Wire Hole 24AWG", tbl_component_type_id=10
X1: library part CSTCE8M00G55-R0, "CER RES 8.0000MHZ 33PF SMD", Manufacturer 1=Murata, Manufacturer 2=Any, Manufacturer Part Number 2="See Description", Supplier Part Number 1=490-1195-1-ND, Cost=0.31, id=889, Manufacturer Part Number 1=CSTCE8M00G55-R0, tbl_component_type_id=6, tbl_suppliers_id=1

## Free pads (board coordinates)
  oval 20x50 hole 12 mask+3: 1(2115,3795) 1(2115,3910) 1(2145,3795) 1(2145,3910) 1(2175,3795) 1(2175,3910)
  oval 60x20 hole 12: 4(2180,3855) 5(2110,3855)

## Via types
v1: diameter 25, hole 12, Top to Bottom, tented both sides, 612 vias
v2: diameter 25, hole 12, Top to Bottom, tented top, 22 vias
v3: diameter 35, hole 20, Top to Bottom, tented top, 4 vias
v4: diameter 30, hole 16, Top to Bottom, tented both sides, 4 vias
v5: diameter 27.56, hole 27.56, Top to Bottom, tented both sides, 2 vias
v6: diameter 25, hole 12, Top to Bottom, 1 vias
v7: diameter 190, hole 190, Top to Bottom, 1 vias
v8: diameter 35, hole 20, Top to Bottom, tented both sides, 1 vias

## Nets (pads, with @x,y where several pads share a name; then routed paths per layer and width w, separated by ;. In a path a pad name is that pad's centre, name@x,y a point inside that pad or via, vN(x,y) a via of type N, cw(c..) or ccw(c..) an arc to the next point about the centre after c; other vN are vias at no path point)
3.3V: C14.2 C16.2 C18.2 C19.2 C24.2 C25.2 C27.2 J2.2 MIC1.1 pad.1@2175,3910 R3.1 R10.1 R14.2 R16.2 R17.2 R18.2 R19.2 R20.2 R21.2 R22.2 R23.2 R24.2 R25.2 R26.2 S1.2 TP14.1 U1.1 U4.6 U4.14 U4.24 U4.34 U4.42 U4.44 U5.8 U6.3 U7.15 U7.16 U7.17 U7.18 WH2.1 | length 5587.2
  Top w15: v3(3603,1463) MIC1.1@3657.28,1463
  Top w20: 2825,2740 2930,2845 2930,2965 2945,2980 S1.2@3011.69,2980 3016.69,2985 v1(3075,2985) ; v8(3370,1505) 3561,1505 v3(3603,1463)
  Bottom w10: U7.15@1715.16,3395.94 1715.16,3432.16 ; U7.16@1734.84,3395.94 v2@1734.84,3449.84 ; U7.17@1754.53,3395.94 1754.53,3449.53 ; U7.18@1774.21,3395.94 v2@1774.21,3449.21 ; R14.2@2374.54,1560 2379.5,1560 C27.2@2439.5,1620 2458.5,1639 2537,1639 2598.51,1700.51 U4.14@2634.89,1700.51 ; R17.2@2628.46,1170 2628.46,1268.46 J2.2@2630,1270 ; R16.2@3360,1251.54 3476.54,1251.54 TP14.1@3485,1260
  Bottom w15: R21.2@1896.54,3685 R22.2@1896.54,3745 R24.2@1896.54,3805 C25.2@1896.54,3863.03 ; C25.2@1898.5,3865 1898.5,3898.5 1970,3970 2150,3970 2175,3945 pad.1@2175,3910 ; R20.2@2038.46,3455 v1(2090,3455) ; R25.2@2038.46,3515 v1(2090,3515) ; R26.2@2038.46,3575 v1(2090,3575) ; U4.14@2634.89,1700.51 2739.49,1700.51 ; 2939.49,1700.51 U4.42@3083.71,1700.51 ; 2942.48,1952.48 U4.34@3083.71,1952.48 3132.48,1952.48 3171.5,1991.5 C14.2@3220,1991.5 ; U5.8@3574.49,1595 3610,1595 3635,1570 3635,1495 v3(3603,1463)
  Bottom w20: C24.2@1750,3518.5 1823.5,3518.5 1900,3595 1900,3635 ; R19.2@2038.46,3275 R18.2@2038.46,3395 ; R26.2@2038.46,3575 R25.2@2038.46,3515 R20.2@2038.46,3455 R18.2@2038.46,3395 ; v1(2090,3395) R18.2@2038.46,3395 ; J2.2@2630,1270 2680,1270 2720,1310 2720,1340 2751.5,1371.5 C16.2@2760,1371.5 2859.3,1470.8 U4.6@2859.3,1570.59 2859.3,1679.3 ; C19.2@2691.5,2150 C18.2@2691.5,2210 2730,2210 2753.39,2233.39 U6.3@2753.39,2290.24 ; 2733.31,1886.69 U4.24@2733.31,2019.41 2733.31,2108.18 ; 2910,1670 2942.48,1637.52 U4.44@3083.71,1637.52 3083.71,1596.29 3133.46,1546.54 R10.1@3230,1546.54 3230,1520 3245,1505 v8(3370,1505) ; v1(3075,2985) 3075,3178.46 R3.1@3136.54,3240
  Bottom w30: TP14.1@3490,1260 WH2.1@3530,1260 3566.58,1260 3603,1296.42 v3(3603,1463)
  other v1: 2850,2260 2850,2300 2850,2340 2010,3630 2050,3630 2090,3630
  other v2: 1730,3460 1775,3460
3V3/2: U5.1 U5.2 U5.5 | length 303.8
  Bottom w15: U5.1@3385.51,1595 U5.2@3385.51,1645 3460,1645 3490,1675 3490,1715 3520,1745 U5.5@3574.49,1745
5V: D9.A J1.1 U4.7 | length 834.4
  Top w10: v1(2765,1435) 2730,1400 2730,1200 2810,1120 3060,1120 v1(3100,1160)
  Bottom w10: v1(2765,1435) 2827.8,1497.8 U4.7@2827.8,1570.59 ; J1.1@2977.48,1175 J1.1@2980,1172.48
A0: TP6.1 U4.36 | length 612.1
  Bottom w10: U4.36@3083.71,1889.49 3269.49,1889.49 3340,1960 3340,2120 3380,2160 TP6.1@3490,2160
A1: TP7.1 U4.37 | length 562.7
  Bottom w10: U4.37@3083.71,1857.99 3137.99,1857.99 3150,1870 3280,1870 3360,1950 3360,2060 3380,2080 TP7.1@3490,2080
A2: TP8.1 U4.38 | length 507.4
  Bottom w10: U4.38@3083.71,1826.5 3136.5,1826.5 3160,1850 3290,1850 3380,1940 3380,1990 3390,2000 TP8.1@3490,2000
A3: TP9.1 U4.39 | length 513.1
  Bottom w10: U4.39@3083.71,1795 3135,1795 3170,1830 3300,1830 3390,1920 TP9.1@3410,1920 ; TP9.1@3465,1920 TP9.1@3410,1920 ; TP9.1@3490,1920 TP9.1@3410,1920
A4: TP10.1 U4.40 | length 438
  Bottom w10: U4.40@3083.71,1763.5 3133.5,1763.5 3180,1810 3355,1810 3385,1840 TP10.1@3490,1840
BUTTON: R2.2 S1.1 TP16.1 U4.21 | length 1988
  Top w10: v1(2275,2925) 2275,2365 2390,2250 v1(2390,2115) ; v1(2765,2905) 2765,2955 2790,2980 2837.09,2980 S1.1@2837.09,2991.22
  Bottom w10: v1(2275,2925) 2745,2925 v1(2765,2905) 2795,2875 2795,2833.46 R2.2@2786.54,2825 ; TP16.1@2380,2000 2360,2020 2360,2085 v1(2390,2115) ; TP16.1@2415,2010 2503,2010 2592.02,1920.98 U4.21@2634.89,1920.98
D4: TP4.1 U4.25 | length 2176.1
  Top w10: v1(2850,2195) 2965,2310 2965,2467.13 3025,2527.13 v1(3025,2635)
  Bottom w10: U4.25@2764.81,2019.41 2764.81,2109.81 v1(2850,2195) ; v1(3025,2635) 3080,2580 3170,2580 3200,2610 3450,2610 3675,2835 4120,2835 4190,2905 4285,2905 TP4.1@4310,2930
D8: TP1.1 U4.28 | length 2174.8
  Top w10: v1(2930,2185) 2930,2240 2985,2295 2985,2455 3060,2530 v1(3060,2645)
  Bottom w10: U4.28@2859.3,2019.41 2859.3,2084.3 2930,2155 v1(2930,2185) ; v1(3060,2645) 3105,2600 3160,2600 3190,2630 3435,2630 3660,2855 4105,2855 4200,2950 4200,2990 4220,3010 4300,3010 TP1.1@4310,3020
D9: R16.1 TP25.1 U4.29 | length 2968
  Top w10: v1(3280,2170) 3283.5,2166.5 3283.5,1330.29 v6(3298.79,1315)
  Top w15: v1@3476.74,1065.55 ccw(c3386.46,1598.73) 3617.31,1109.71 ccw(c3503.82,1384.35) 3657.24,1129.85 ccw(c3545.02,1365.01) 3692.82,1150.43 ; 3679.15,1085.57 ccw(c3693.93,1070.32) 3692.62,1049.12 3880.62,1049.12 ; 3679.67,1085.03 ccw(c3561.02,1317.01) 3708.82,1102.43 ; 3692.83,1150.43 ccw(c3333.21,1616.1) 3722.22,1174.68 ccw(c3269.05,1688.83) 3750.78,1201.34 cw(c3783.33,1149.73) 3801.87,1207.86 ; 3708.83,1102.43 ccw(c3349.21,1568.1) 3738.22,1126.68 cw(c3828.17,1035.93) 3758.62,1143.12 cw(c3796.65,1094.88) 3776.36,1152.86 cw(c3788.21,1102.35) 3809.35,1149.73 cw(c3744.66,1008.33) 3847.49,1124.97 cw(c3840.33,1112.83) 3843.62,1099.12 cw(c3838.57,1118.13) v1(3826,1103) cw(c3796,1182.4) 3787,1098 ; 3801.69,1207.3 cw(c3660.33,865.3) 3838.35,1189.73 cw(c3773.66,1048.33) 3911.58,1120.14 cw(c3861.09,1100.61) 3880.62,1050.12
  Bottom w10: U4.29@2890.8,2019.41 2890.8,2080.8 2960,2150 2960,2200 2980,2220 3130,2220 3155,2195 3255,2195 v1(3280,2170) ; R16.1@3360,1318.46 3356.54,1315 v6(3298.79,1315) 3298.79,1176.79 3325.29,1150.29 3324.5,1149.5 3410,1064 v1(3477,1064)
D11: TP17.1 U4.12 | length 453.6
  Bottom w10: TP17.1@2230,1520 2480,1520 2597.52,1637.52 U4.12@2634.89,1637.52
D17: R17.1 TP23.1 U4.8 | length 1885.3
  Top w15: 1976,1051 2164,1051 ccw(c2162.69,1072.2) 2177.47,1087.44 ; 1976,1052 cw(c1995.53,1102.49) 1945.04,1122.02 cw(c2082.96,1050.21) 2018.26,1191.61 cw(c2196.29,867.18) 2054.93,1209.18 ; 2054.75,1209.74 cw(c2073.29,1151.61) 2105.84,1203.22 ccw(c2587.57,1690.71) 2134.4,1176.56 ccw(c2523.41,1617.98) 2163.79,1152.3 ccw(c2311.6,1366.89) 2199.38,1131.73 ccw(c2352.8,1386.23) 2239.31,1111.59 ccw(c2470.16,1600.61) v1@2333.13,1077.49 ; 2065.78,1098.19 ccw(c2020.13,928.47) v1(2029,1104) cw(c2020,1115) 2009,1106 cw(c2019.49,1116.36) 2009.13,1126.85 cw(c2111.96,1010.21) 2047.26,1151.61 cw(c2068.41,1104.23) 2080.26,1154.74 cw(c2059.97,1096.76) 2098,1145 cw(c2028.45,1037.81) 2118.4,1128.56 ccw(c2507.41,1569.98) 2147.79,1104.3 ccw(c2295.6,1318.89) 2176.95,1086.91
  Bottom w10: v1(2333,1077) 2356,1100 2450,1100 2510,1160 2510,1290 2540,1320 2680,1320 2690,1330 2690,1350 2710,1370 2710,1430 2796.31,1516.31 U4.8@2796.31,1570.59
D18: TP2.1 U4.22 | length 1605.8
  Top w10: v1(1815,2865) 1815,2698.23 2185,2328.23 v1(2185,2319.12)
  Bottom w10: TP2.1@1535,2925 1565,2925 1588.27,2901.73 1613.27,2901.73 1640,2875 1805,2875 v1(1815,2865) ; v1(2185,2319.12) 2230.88,2319.12 2597.52,1952.48 U4.22@2634.89,1952.48
D_N: R8.2 U4.3 | length 220.7
  Bottom w18: U4.3@2953.79,1570.59 2953.79,1521.24 2950.5,1517.95 2950.5,1402.68 2968,1385.18 R8.2@2968,1358.46
D_P: R15.2 U4.4 | length 221.1
  Bottom w18: R15.2@2909,1358.46 2909,1385.18 2926.5,1402.68 2926.5,1517.03 2922.29,1521.24 U4.4@2922.29,1570.59